# Altium PCB Lilypad_PCB1.PcbDoc
Units mil, origin at the board's own origin, x right, y up, seen from the top; angles counter-clockwise.
Board outline 3900 x 3900 mil, 2 copper layers (Top Layer, Bottom Layer), stack 12.8 mil thick; 38 components, 30 nets, 107 pads, 0 vias.
Unrouted connection lines stored in the file: 64.
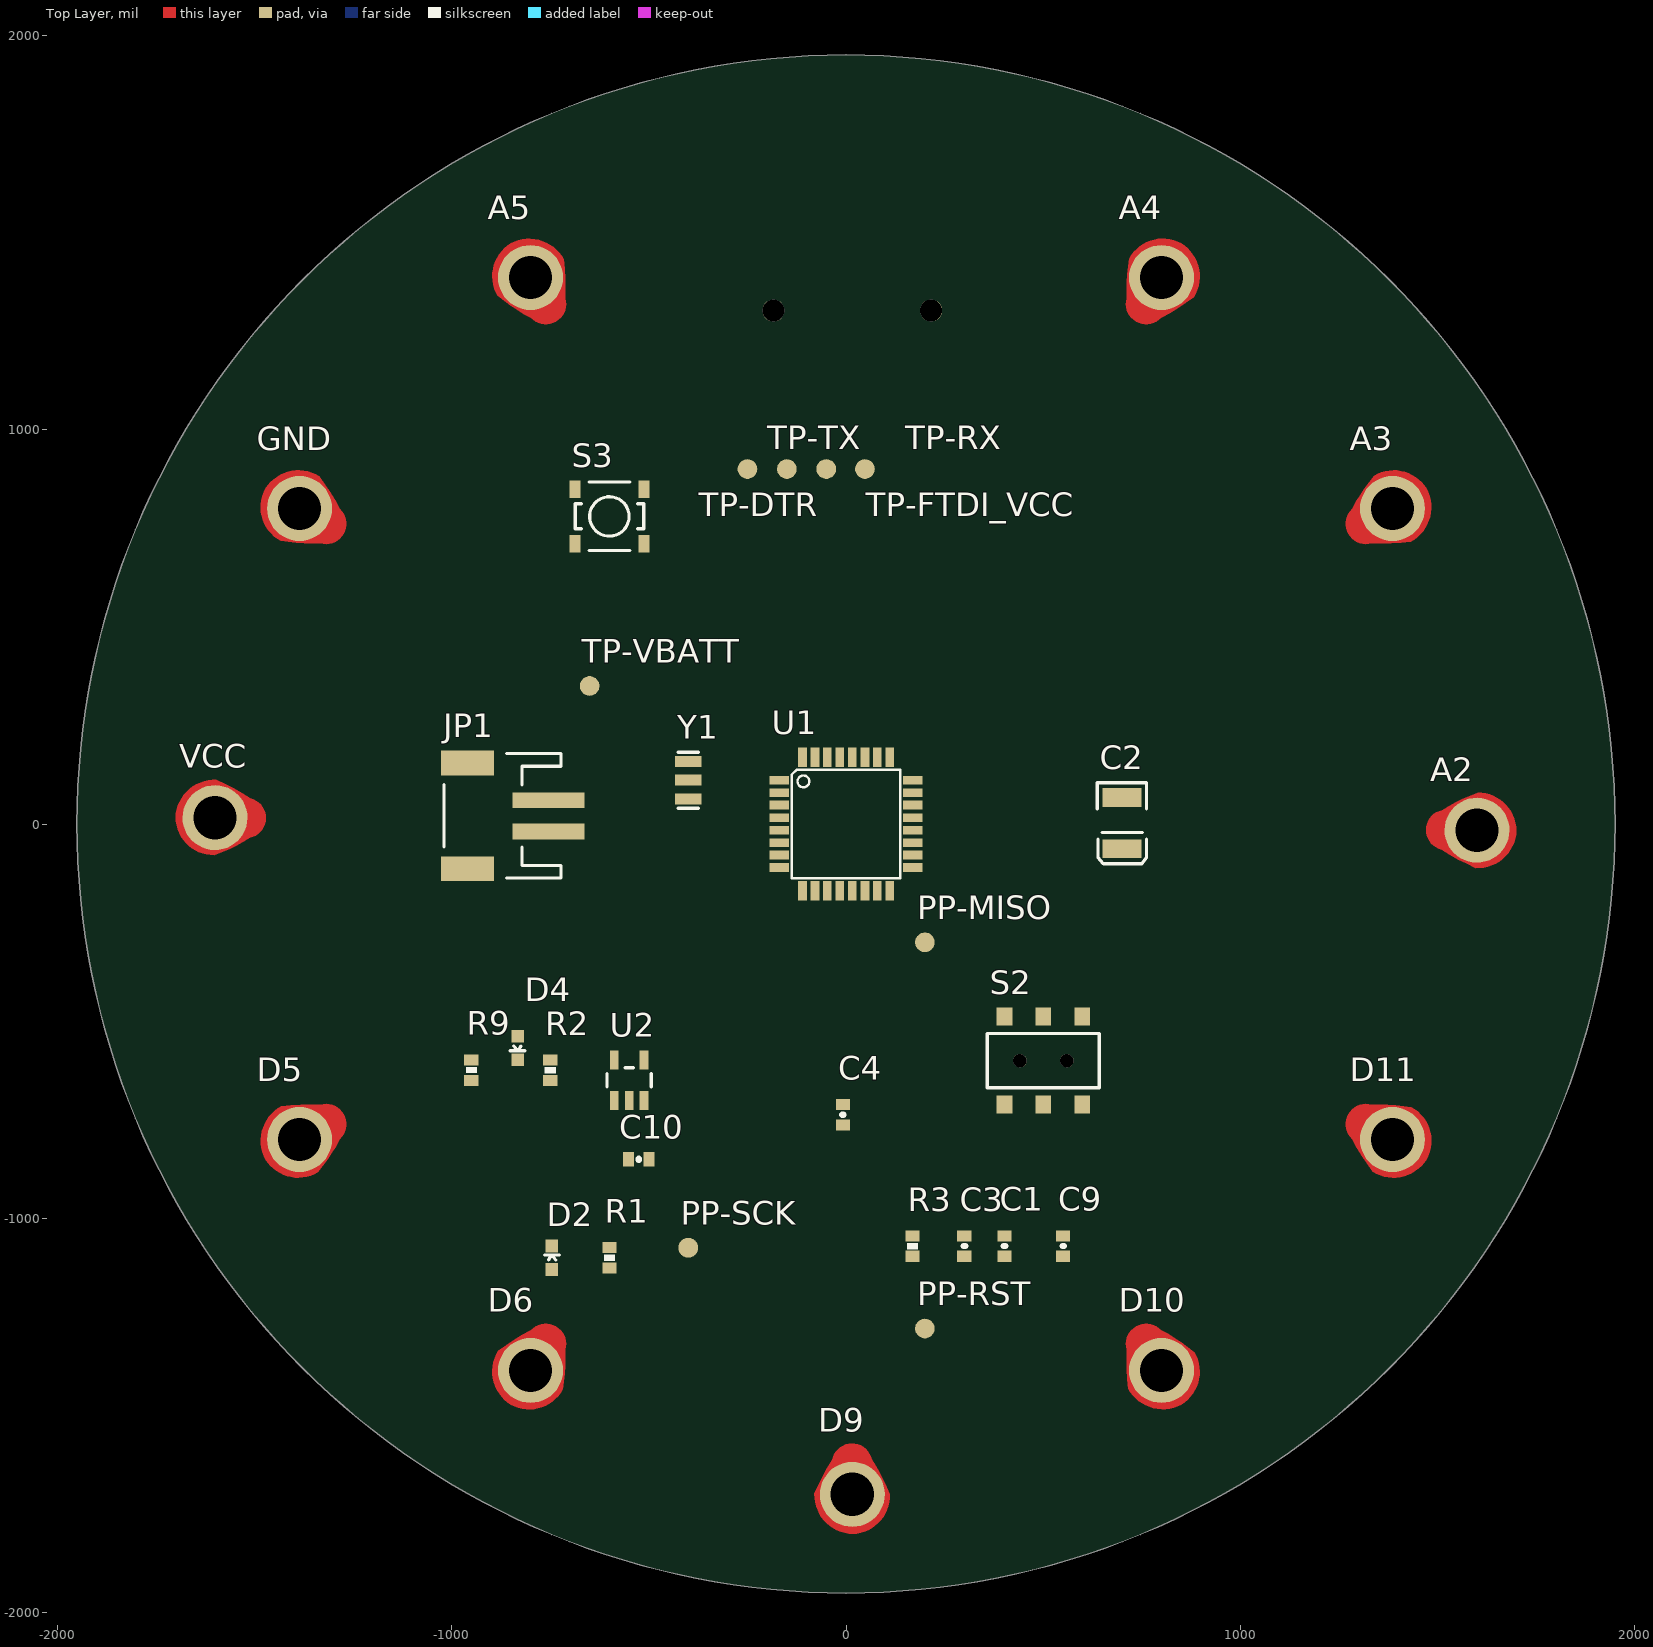
[diagram p0: Top Layer view]
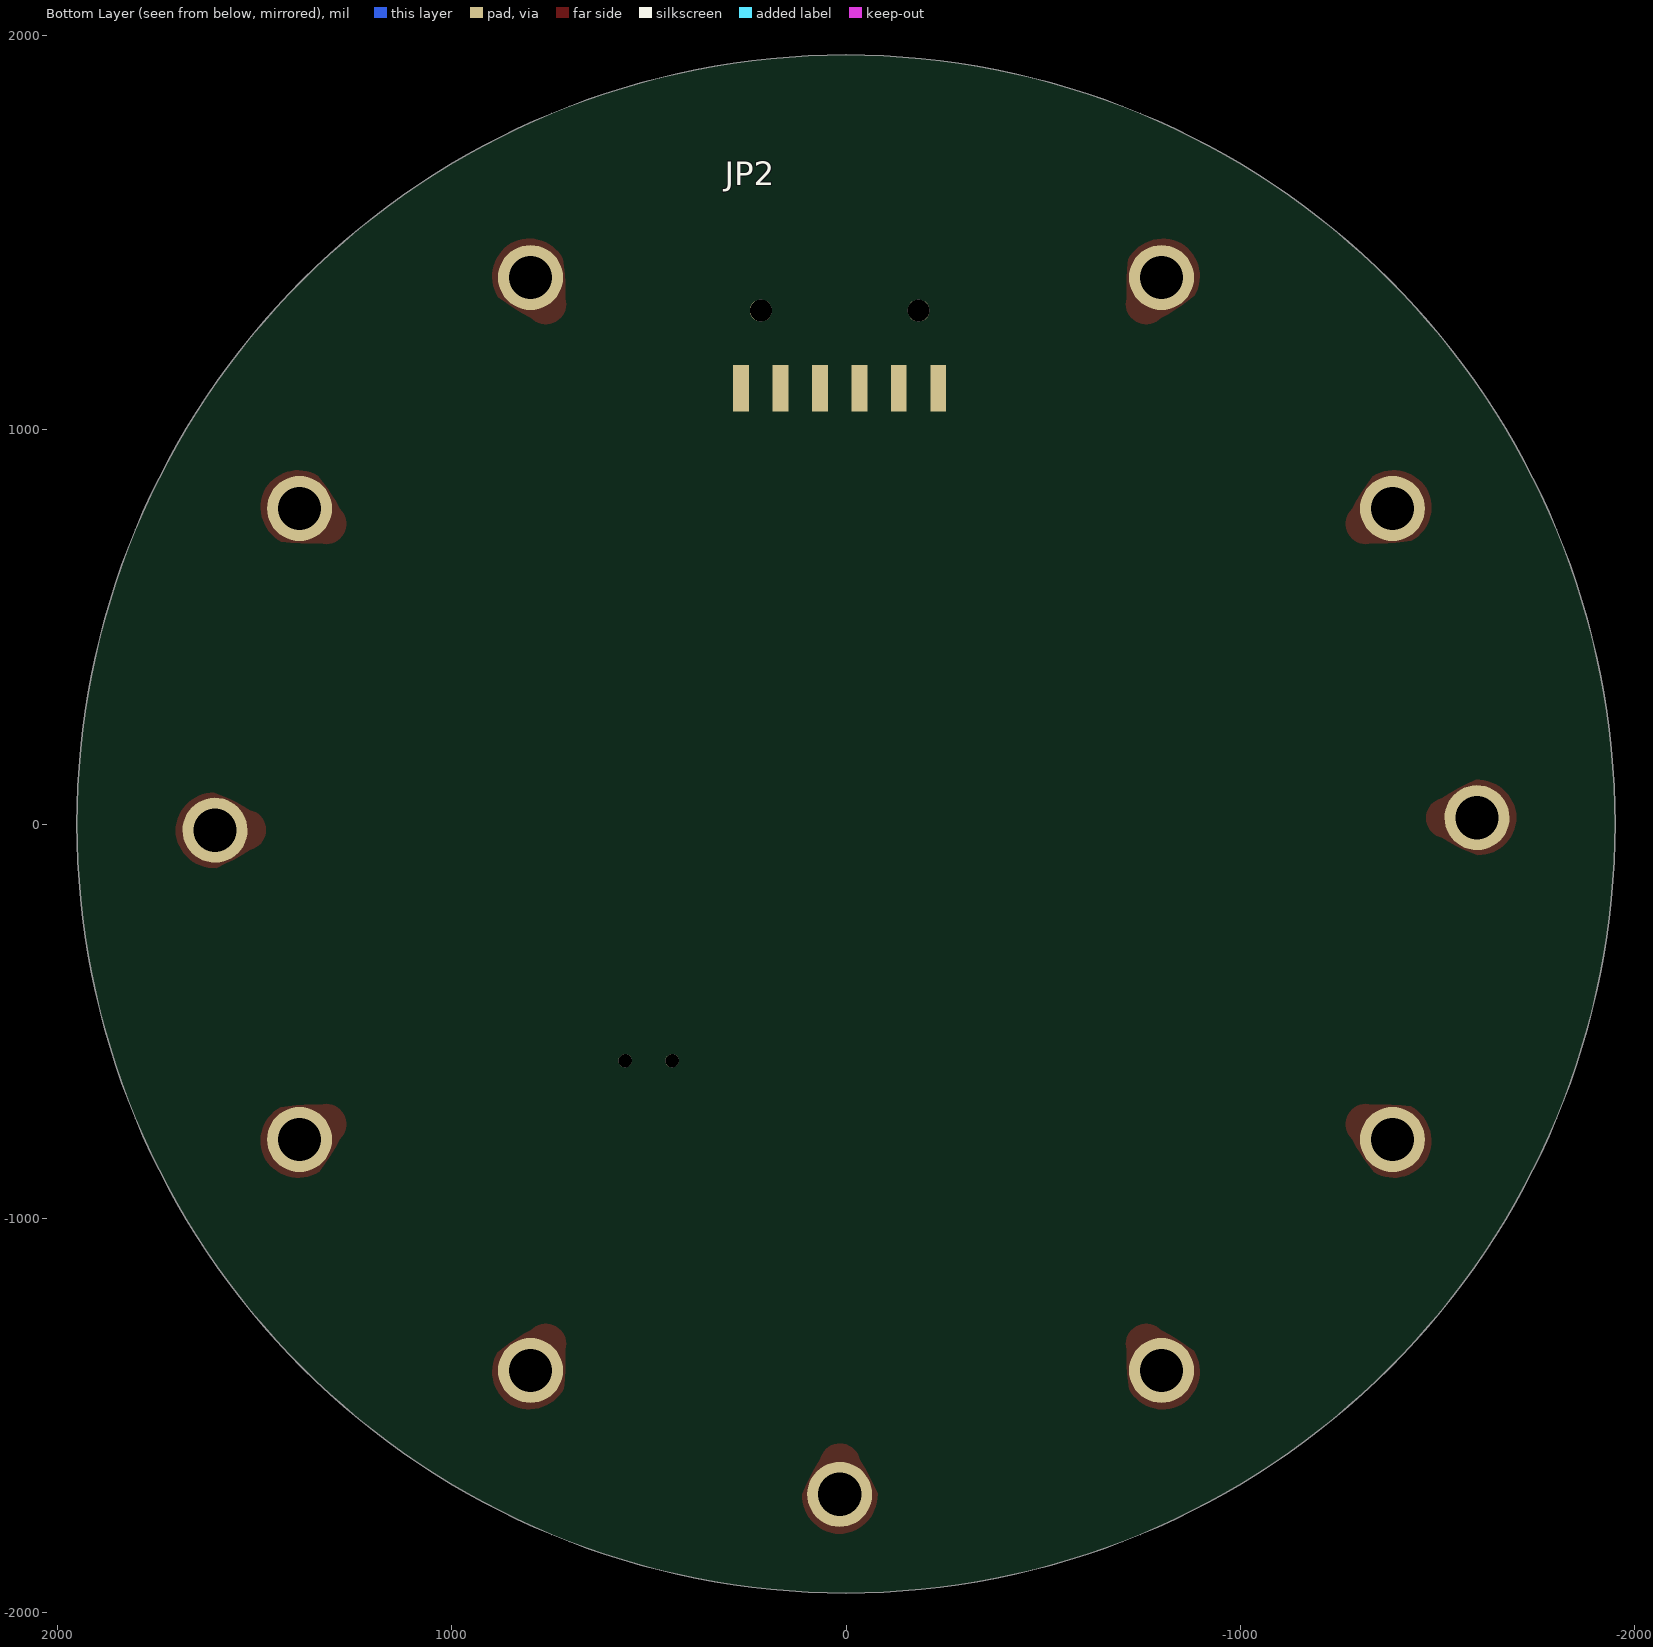
[diagram p1: Bottom Layer view, seen from below]

## Layer stack, top to bottom
Top Solder: solder mask 0.4, Solder Resist, Dk 3.5
Top Layer: signal copper 1.4
Dielectric 1: core 10, FR-4, Dk 4.2
Bottom Layer: signal copper 1.4
Bottom Solder: solder mask 0.4, Solder Resist, Dk 3.5

## Board outline
-1950,0 ccw(c0,0) 0,-1950 ccw(c0,0) 1950,0 ccw(c0,0) 0,1950 ccw(c0,0)

## Design rules (kind name [scope] priority, off if disabled: settings)
Clearance [All] p1: gap=8 ignorepadtopadclearanceinfootprint=FALSE
PolygonConnect [All] p1: connectstyle=Relief reliefconductorwidth=10 reliefentries=4 polygonreliefangle="90 Angle" airgapwidth=10
RoutingVias [All] p1: holewidth=28 width=50 viastyle="Through Hole" minholewidth=28 minwidth=50 maxholewidth=28 maxwidth=50
SolderMaskExpansion [All] p1: expansion=4
Width [All] p1: maxlimit=10 minlimit=10 preferedwidth=10
30 further rules are at their usual default settings.

## Components (designator, comment, footprint, x,y, rotation, side; value= is the part's Value field where it differs from the comment)
A2 "CONN" PETAL-LONG-2 1599.92,-15.75 r89.44 top
A3 "CONN" PETAL-LONG-2 1385.64,800 r120 top (schematic designator TP7)
A4 "CONN" PETAL-LONG-2 800,1385.64 r150 top
A5 "CONN" PETAL-LONG-2 -800,1385.64 r210 top
C1 "CAP0402-CAP" 0402-CAP 401.57,-1070 r270 top
C2 "CAP_POL3528" EIA3528 700,2.19 r270 top
C3 "CAP0402-CAP" 0402-CAP 300,-1070 r270 top
C4 "CAP0402-CAP" 0402-CAP -7.45,-737.22 r90 top
C9 "CAP0402-CAP" 0402-CAP 550,-1070 r270 top
C10 "CAP0402-CAP" 0402-CAP -525.59,-850 r180 top
D2 "LED0603" LED-0603 -746.04,-1100 r0 top
D4 "LED0603" LED-0603 -832.49,-568 r180 top
D5 "CONN" PETAL-LONG-2 -1385.64,-800 r300 top
D6 "CONN" PETAL-LONG-2 -800,-1385.64 r330 top
D9 "CONN" PETAL-LONG-2 16,-1699.92 r0.54 top
D10 "CONN" PETAL-LONG-2 800,-1385.64 r30 top
D11 "CONN" PETAL-LONG-2 1385.64,-800 r60 top
GND "CONN" PETAL-LONG-2 -1385.64,800 r240 top
JP1 "M02-JST-2MM-SMT" JST-2-SMD -900,20.5 r90 top
JP2 "ARDUINO_SERIAL_PROGRAMSMD" 1X06-SMD 16,1301.94 r0 bottom
PP-MISO "TEST-POINT3X5" PAD.03X.05 200,-300 r90 top
PP-RST "TEST-POINT3X5" PAD.03X.05 200,-1279.31 r90 top
PP-SCK "TEST-POINT3X5" PAD.03X.05 -400,-1074.41 r90 top
R1 "RESISTOR0402-RES" 0402-RES -600,-1100 r270 top
R2 "RESISTOR0402-RES" 0402-RES -749.95,-624.41 r90 top
R3 "RESISTOR0402-RES" 0402-RES 169,-1070.41 r90 top
R9 "RESISTOR0402-RES" 0402-RES -950,-624 r270 top
S2 "AYZ0202" AYZ0202 500,-600 r0 top
S3 "SWITCH-MOMENTARY-2SMD-2" TACTILE_SWITCH_SMD-2 -600,779.95 r0 top
TP-DTR "TEST-POINT3X5" PAD.03X.05 -250,900 r90 top
TP-FTDI_VCC "TEST-POINT3X5" PAD.03X.05 48,900 r90 top
TP-RX "TEST-POINT3X5" PAD.03X.05 -50,900 r90 top
TP-TX "TEST-POINT3X5" PAD.03X.05 -150,900 r90 top
TP-VBATT "TEST-POINT3X5" PAD.03X.05 -650,350 r90 top
U1 "ATMEGA328" TQFP32-08 0,0 r0 top
U2 "MCP73831" SOT23-5 -550,-650 r0 top
VCC "CONN" PETAL-LONG-2 -1599.92,16 r269.43 top
Y1 "RESONATORSMD" RESONATOR-SMD -400,111 r270 top

## Footprints (in the part's own frame and the unit in brackets; to place one, negate y for a bottom-side part, rotate by r counter-clockwise, add the part's x,y. Pads: shape width x height; smd on the part's side, far side on the other; paste and mask are expansions set on the pad)
1X06-SMD [mil]
  rect 40x119 smd: 1(-250,197) 2(-150,197) 3(-50,197) 4(50,197) 5(150,197) 6(250,197)
  round 56 hole 56: 1(-200,0) 1(200,0)
0402-CAP [mil]
  rect 28x36 smd: 1(-25.59,0) 2(26,0)
  silkscreen extent 0,-1 0,2
0402-RES [mil]
  rect 28x36 smd: 1(-25.59,0) 2(26,0)
  silkscreen extent -8,-14 8,14
AYZ0202 [mil]
  rect 40x46 smd: 1(-98.43,112) 2(0,112) 3(99,112) 4(-98.43,-111.22) 5(0,-111.22) 6(99,-111.22)
  round 34 hole 34: 1(-59.06,0) 1(60,0)
  silkscreen extent -142,-69 142,69
EIA3528 [mil]
  rect 48x99 smd: A(65,0) C(-64.96,0)
  silkscreen extent -102,-63 103,62
JST-2-SMD [mil]
  rect 40x182 smd: 1(-39.37,-145.67) 2(40,-145.67)
  rect 63x134 smd: NC1(-133.86,60) NC2(134,60)
  silkscreen extent -157,-177 158,119
LED-0603 [mil]
  rect 32x32 smd: A(0,-29.53) C(0,30)
  silkscreen extent -18,-6 19,7
PAD.03X.05 [mil]
  rrect100% 50x50 smd: P$1(0,0)
PETAL-LONG-2 [mil]
  round 165 hole 110: 1(0,0)
  Top Layer region: -50,89 -74.74,46.44 -95.91,2 -95.91,2 -89.54,-36.1 -69.08,-68.87 -37.64,-91.31 0,-100 0,-100 48.27,-85.94 83.04,-49.62 95,-0.79 95,-0.79 74.99,45.35 50,89 50,89 40.14,109.62 22.29,123.91 0,129.01 -22.29,123.91 -40.14,109.62 -50,89
RESONATOR-SMD [mil]
  rect 28x67 smd: 1(-47.24,0) 2(0,0) 3(48,0)
  silkscreen extent -71,-26 71,26
SOT23-5 [mil]
  rect 22x48 smd: 1(-37.4,-51.18) 2(0,-51.18) 3(38,-51.18) 4(38,52) 5(-37.4,52)
  silkscreen extent -56,-17 56,32
TACTILE_SWITCH_SMD-2 [mil]
  rect 28x44 smd: 1(88,69) 2(88,-68.9) 3(-87.6,-68.9) 4(-87.6,69)
  silkscreen extent -87,-87 87,87
TQFP32-08 [mil]
  rect 50x22 smd: 1(-169,111) 2(-169,79) 3(-169,48) 4(-169,16) 5(-169,-15.75) 6(-169,-47.24) 7(-169,-78.74) 8(-169,-110.24) 17(169,-110.24) 18(169,-78.74) 19(169,-47.24) 20(169,-15.75) 21(169,16) 22(169,48) 23(169,79) 24(169,111)
  rect 22x50 smd: 9(-110.24,-169) 10(-78.74,-169) 11(-47.24,-169) 12(-15.75,-169) 13(16,-169) 14(48,-169) 15(79,-169) 16(111,-169) 25(111,169) 26(79,169) 27(48,169) 28(16,169) 29(-15.75,169) 30(-47.24,169) 31(-78.74,169) 32(-110.24,169)
  silkscreen extent -138,-138 138,138

## Nets (pads, with @x,y where several pads share a name; then routed paths per layer and width w, separated by ;. In a path a pad name is that pad's centre, name@x,y a point inside that pad or via, vN(x,y) a via of type N, cw(c..) or ccw(c..) an arc to the next point about the centre after c; other vN are vias at no path point)
A2: A2.1 U1.23
A3: A3.1 U1.24
A4: A4.1 U1.25
A5: A5.1 U1.26
D5: D5.1 U1.9
D6: D6.1 U1.10
D9: D9.1 U1.13
D10: D10.1 U1.14
D11: D11.1 U1.15
D12: PP-MISO.P$1 U1.16
D13: PP-SCK.P$1 R1.1 U1.17
DTR: C4.1
FTDI_VCC: C9.1 D4.A S2.3 S2.6 U2.4
GND: C1.2 C2.C C3.2 C9.2 C10.2 D2.C GND.1 JP1.1 JP2.5 JP2.6 R2.1 S3.2 U1.3 U1.5 U1.21 U2.2 Y1.2
NetC10_1: C10.1 U2.3
NetD2_A: D2.A R1.2
NetD4_C: D4.C R9.1
NetJP2_1: JP2.1 TP-DTR.P$1
NetJP2_2: JP2.2 TP-TX.P$1
NetJP2_3: JP2.3 TP-RX.P$1
NetJP2_4: JP2.4 TP-FTDI_VCC.P$1
NetR2_2: R2.2 U2.5
NetR9_2: R9.2 U2.1
NetU1_7: U1.7 Y1.1
NetU1_8: U1.8 Y1.3
RST: C4.2 PP-RST.P$1 R3.1 S3.1 U1.29
RXI: U1.30
TXO: U1.31
VBATT: JP1.2 S2.1 S2.4 TP-VBATT.P$1
VCC: C1.1 C2.A C3.1 R3.2 S2.2 S2.5 U1.4 U1.6 U1.18 U1.20 VCC.1
pads on no net: JP1.NC1 JP1.NC2 S3.3 S3.4 U1.1 U1.2 U1.11 U1.12 U1.19 U1.22 U1.27 U1.28 U1.32

## Silkscreen, mask and mechanical layers (free items; w line width, h text height)
Mechanical 1:
  circle w10: c0,0 r1950

## Text inside footprints (layer, text, board x,y; h text height)
JP1: Mechanical 16 "-" at -725,-94.5 h77.5 r90; Mechanical 16 "+" at -725,105.5 h77.5 r90